# Altium PCB PCB1.PcbDoc (part 1 of 2)
Units mil, origin at the board's own origin, x right, y up, seen from the top; angles counter-clockwise.
Board outline 3937.01 x 3937.01 mil, 2 copper layers (Top Layer, Bottom Layer); 147 components, 119 nets, 531 pads, 24 vias.
Unrouted connection lines stored in the file: 277.
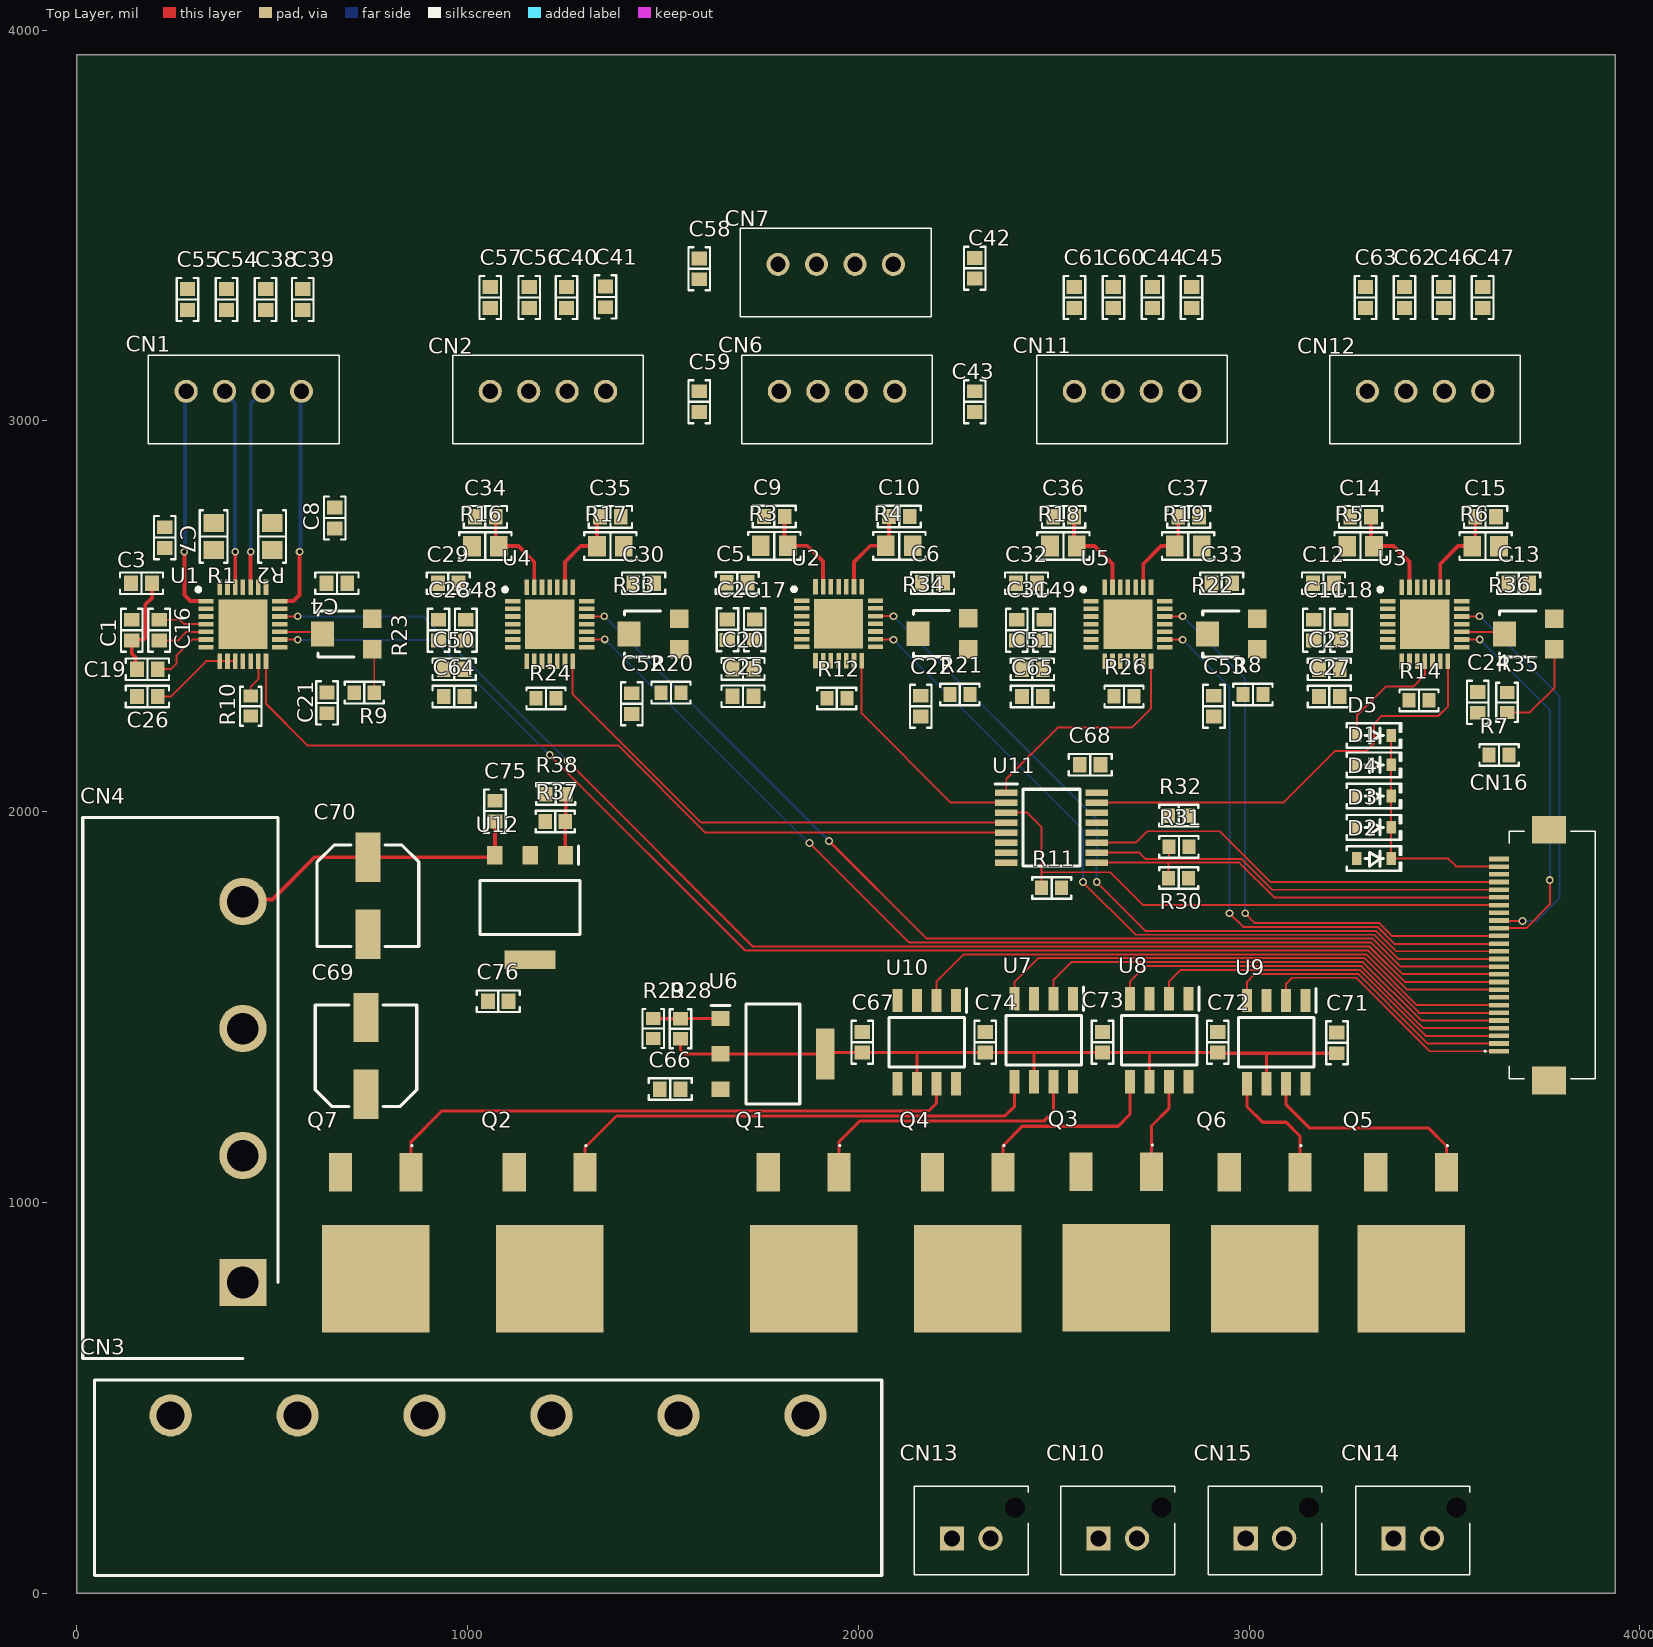
[diagram p0: Top Layer view]
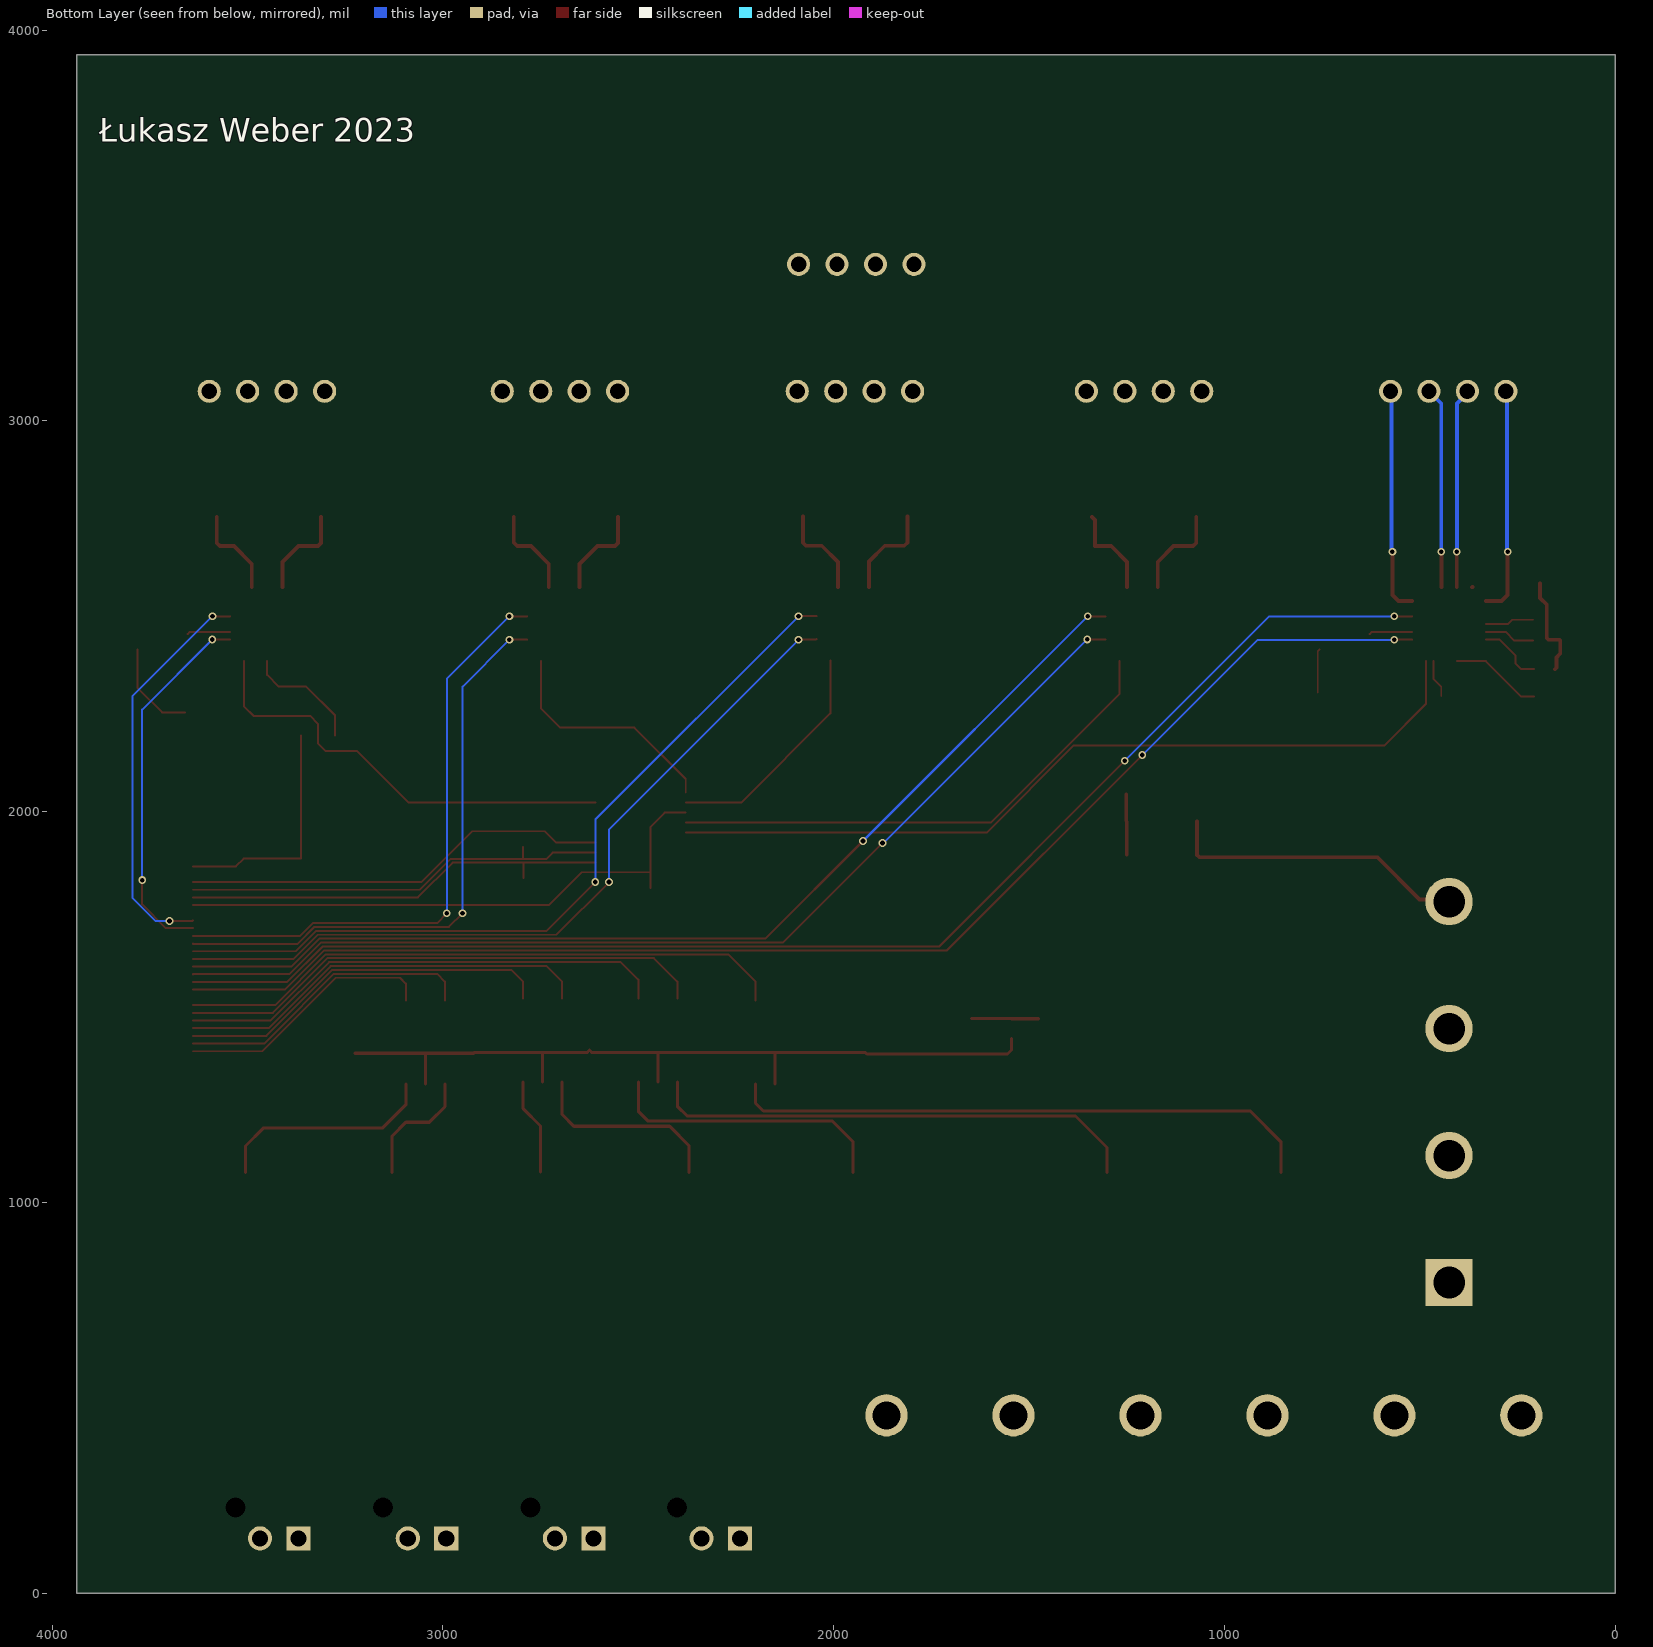
[diagram p1: Bottom Layer view, seen from below]

## Layer stack, top to bottom
Top Solder: solder mask 0.4, Solder Resist, Dk 3.5
Top Layer: signal copper 1.4
Dielectric 1: dielectric 12.6, FR-4, Dk 4.8
Bottom Layer: signal copper 1.4
Bottom Solder: solder mask 0.4, Solder Resist, Dk 3.5

## Board outline
0,0 0,3937.01 3937.01,3937.01 3937.01,0

## Design rules (kind name [scope] priority, off if disabled: settings)
BoardOutlineClearance [All] p1: gap=7.87 ignorepadtopadclearanceinfootprint=FALSE
Clearance [All] p1: gap=5 ignorepadtopadclearanceinfootprint=FALSE except(9.84: Arc-Hole Track-Hole SMDPad-Hole THPad-Hole Via-Hole Fill-Hole Poly-Hole Region-Hole Text-Hole)
ComponentClearance [All] p1: gap=5 collisioncheckmode=3 verticalgap=5 showdistances=TRUE
DiffPairsRouting [All] p1: maxlimit=10 minlimit=5 mostfreqgap=5 toplayer_minwidth=5 toplayer_maxwidth=1000 toplayer_prefwidth=5 bottomlayer_minwidth=5 bottomlayer_maxwidth=1000 bottomlayer_prefwidth=5 maxuncoupledlength=500
Height [All] p1: minheight=0 maxheight=71497.94 prefheight=500
HoleSize [All] p1: absolutevalues=TRUE maxlimit=248.03 minlimit=11.81 maxpercent=80.000 minpercent=20.000
HoleToHoleClearance [All] p1: gap=9.84 allowstackedmicrovias=FALSE
MinimumAnnularRing [All] p1: minimumring=3
MinimumSolderMaskSliver [All] p1: minsoldermaskwidth=0
PlaneClearance [All] p1: clearance=5
PlaneConnect PlaneConnectPowerPads [InPadClass('PowerPads')] p1: planeconnectstyle=Direct reliefexpansion=20 reliefentries=4 reliefconductorwidth=10 reliefairgap=10
PlaneConnect [All] p2: pad.planeconnectstyle=Relief pad.reliefexpansion=11.81 pad.reliefentries=4 pad.reliefconductorwidth=5 pad.reliefairgap=5 via.planeconnectstyle=Direct via.reliefexpansion=11.81 via.reliefentries=4 via.reliefconductorwidth=5 via.reliefairgap=5
PolygonConnect PolygonConnect_1 [InNet('VS')] p1: thpad.connectstyle=Relief thpad.reliefconductorwidth=10 thpad.reliefentries=4 thpad.polygonreliefangle="90 Angle" thpad.airgapwidth=10 smdpad.connectstyle=Direct smdpad.reliefconductorwidth=10 smdpad.reliefentries=4 smdpad.polygonreliefangle="90 Angle" smdpad.airgapwidth=10 via.connectstyle=Direct via.reliefconductorwidth=10 via.reliefentries=4 via.polygonreliefangle="90 Angle" via.airgapwidth=10
PolygonConnect PolygonConnectPowerPads [All vs (InPadClass('PowerPads'))] p2: connectstyle=Direct reliefconductorwidth=10 reliefentries=4 polygonreliefangle="90 Angle" airgapwidth=10
PolygonConnect [All] p3: thpad.connectstyle=Relief thpad.reliefconductorwidth=10 thpad.reliefentries=4 thpad.polygonreliefangle="90 Angle" thpad.airgapwidth=10 smdpad.connectstyle=Relief smdpad.reliefconductorwidth=10 smdpad.reliefentries=4 smdpad.polygonreliefangle="90 Angle" smdpad.airgapwidth=10 via.connectstyle=Direct via.reliefconductorwidth=5 via.reliefentries=4 via.polygonreliefangle="90 Angle" via.airgapwidth=5
RoomDefinition "Stepper Motor Drivers" [InComponentClass('Stepper Motor Drivers')] p1: confinementstyle=ConfineIn formatcopy=TRUE lockcomponents=FALSE outline -2370,-1261 -370,-1261 -370,-261 -2370,-261
RoomDefinition "Stepper Logic" [InComponentClass('Stepper Logic')] p2: confinementstyle=ConfineIn formatcopy=TRUE lockcomponents=FALSE outline -2370,-1261 -370,-1261 -370,-261 -2370,-261
RoomDefinition "PWM Driver" [InComponentClass('PWM Driver')] p3: confinementstyle=ConfineIn formatcopy=TRUE lockcomponents=FALSE outline -2370,-1261 -370,-1261 -370,-261 -2370,-261
RoomDefinition PowerDriver [InComponentClass('PowerDriver')] p4: confinementstyle=ConfineIn formatcopy=TRUE lockcomponents=FALSE outline -2370,-1261 -370,-1261 -370,-261 -2370,-261
RoutingVias [All] p1: holewidth=11.81 width=23.62 viastyle="Through Hole" minholewidth=11.81 minwidth=23.62 maxholewidth=23.62 maxwidth=259.84
SilkToSilkClearance [All] p1: silktosilkclearance=0
SilkToSolderMaskClearance [IsPad] p1: minsilkscreentomaskgap=4 clearancetoexposedcopper=TRUE
SolderMaskExpansion [All] p1: expansion=2.95 istentingtop=FALSE
Width [All] p1: maxlimit=1000 minlimit=5 preferedwidth=5 minimp=50.000000 maximp=50.000000 favimp=50.000000
20 further rules are at their usual default settings.

## Classes and differential pairs
net class U12_Nets: 3V3 5V NetR37_1
net class R38_Nets: GND NetR37_1
net class R37_Nets: 3V3 NetR37_1
net class R36_Nets: GND NetR35_2 NetR36_2
net class R35_Nets: 3V3 NetR35_2
net class R34_Nets: GND NetR21_2 NetR34_2
net class R33_Nets: GND NetR20_2 NetR33_2
net class R23_Nets: GND NetR9_2 NetR23_2
net class R22_Nets: GND NetR8_2 NetR22_2
net class R21_Nets: 3V3 NetR21_2
net class R20_Nets: 3V3 NetR20_2
net class R9_Nets: 3V3 NetR9_2
net class R8_Nets: 3V3 NetR8_2
net class CN4_Nets: 5V 24V GND
net class C76_Nets: 3V3 GND
net class C75_Nets: 5V GND
net class C74_Nets: 12V GND
net class C73_Nets: 12V GND
net class C72_Nets: 12V GND
net class C71_Nets: 12V GND
net class U11_Nets: 3V3 GND MLPX_A MLPX_B MLPX_C NetU11_2 NetU11_4 NetU11_5 NetU11_7 UART UART1 UART2 UART3 UART4 UART5
net class U10_Nets: 12V BEDG GND NetCN16_7 NetU10_1 NetU10_4 NetU10_5 NetU10_8
net class U9_Nets: 12V FANG GND NetCN16_1 NetCN16_2 NetU9_1 NetU9_8 NZLFG
net class U8_Nets: 12V FHE0G FHE1G GND NetCN16_3 NetCN16_4 NetU8_1 NetU8_8
net class U7_Nets: 12V GND HE0G HE1G NetCN16_5 NetCN16_6 NetU7_1 NetU7_8
net class U6_Nets: 12V 24V NetR28_1
net class U5_Nets: 3V3 24V DIR4 ENN GND NetC36_1 NetC37_1 NetC49_1 NetC49_2 NetC51_2 NetC65_2 NetD1_1 NetR22_2 NetR26_2 NetU5_7 NetU5_12 NetU5_20 NetU5_25 OA7 OA8 OB7 OB8 STEP4 UART4
net class U4_Nets: 3V3 24V DIR2 ENN GND NetC34_1 NetC35_1 NetC48_1 NetC48_2 NetC50_2 NetC64_2 NetD3_1 NetR24_2 NetR33_2 NetU4_7 NetU4_12 NetU4_20 NetU4_25 OA3 OA4 OB3 OB4 STEP2 UART2
net class U3_Nets: 3V3 24V DIR5 ENN GND NetC14_1 NetC15_1 NetC18_1 NetC18_2 NetC23_2 NetC27_2 NetD5_1 NetR14_2 NetR36_2 NetU3_7 NetU3_12 NetU3_20 NetU3_25 OA9 OA10 OB9 OB10 STEP5 UART5
net class U2_Nets: 3V3 24V DIR3 ENN GND NetC9_1 NetC10_1 NetC17_1 NetC17_2 NetC20_2 NetC25_2 NetD4_1 NetR12_2 NetR34_2 NetU2_7 NetU2_12 NetU2_20 NetU2_25 OA5 OA6 OB5 OB6 STEP3 UART3
net class U1_Nets: 3V3 24V DIR1 ENN GND NetC7_1 NetC8_1 NetC16_1 NetC16_2 NetC19_2 NetC26_2 NetD2_1 NetR10_2 NetR23_2 NetU1_7 NetU1_12 NetU1_20 NetU1_25 OA1 OA2 OB1 OB2 STEP1 UART1
net class R30_Nets: GND MLPX_A
net class R31_Nets: GND MLPX_B
net class R32_Nets: GND MLPX_C
net class R29_Nets: GND NetR28_1
net class R28_Nets: 12V NetR28_1
net class R26_Nets: GND NetR26_2
net class R24_Nets: GND NetR24_2
net class R19_Nets: GND NetC37_1
net class R18_Nets: GND NetC36_1
net class R17_Nets: GND NetC35_1
net class R16_Nets: GND NetC34_1
net class R14_Nets: GND NetR14_2
net class R12_Nets: GND NetR12_2
net class R11_Nets: 3V3 UART
net class R10_Nets: GND NetR10_2
net class R7_Nets: 3V3 ENN
net class R6_Nets: GND NetC15_1
net class R5_Nets: GND NetC14_1
net class R4_Nets: GND NetC10_1
net class R3_Nets: GND NetC9_1
net class R2_Nets: GND NetC8_1
net class R1_Nets: GND NetC7_1
net class Q7_Nets: BED BEDG GND
net class Q6_Nets: FANG GND NetCN15_2
net class Q5_Nets: GND NetCN14_2 NZLFG
net class Q4_Nets: FHE1G GND NetCN13_2
net class Q3_Nets: FHE0G GND NetCN10_2
net class Q2_Nets: GND HE1 HE1G
net class Q1_Nets: GND HE0 HE0G
net class D5_Nets: DIAG NetD5_1
net class D4_Nets: DIAG NetD4_1
net class D3_Nets: DIAG NetD3_1
net class D2_Nets: DIAG NetD2_1
net class D1_Nets: DIAG NetD1_1
net class CN16_Nets: DIAG DIR1 DIR2 DIR3 DIR4 DIR5 ENN GND MLPX_A MLPX_B MLPX_C NetCN16_1 NetCN16_2 NetCN16_3 NetCN16_4 NetCN16_5 NetCN16_6 NetCN16_7 STEP1 STEP2 STEP3 STEP4 STEP5 UART
net class CN15_Nets: 24V NetCN15_2
net class CN14_Nets: 24V NetCN14_2
net class CN13_Nets: 24V NetCN13_2
net class CN12_Nets: NetCN12_2 NetCN12_5 OA9 OA10 OB9 OB10
net class CN11_Nets: NetCN11_2 NetCN11_5 OA7 OA8 OB7 OB8
net class CN10_Nets: 24V NetCN10_2
net class CN7_Nets: NetCN7_2 NetCN7_5 OA5 OA6 OB5 OB6
net class CN6_Nets: NetCN6_2 NetCN6_5 OA5 OA6 OB5 OB6
net class C68_Nets: 3V3 GND
net class CN3_Nets: 24V BED HE0 HE1
net class CN2_Nets: NetCN2_2 NetCN2_5 OA3 OA4 OB3 OB4
net class CN1_Nets: NetCN1_2 NetCN1_5 OA1 OA2 OB1 OB2
net class C70_Nets: 5V GND
net class C69_Nets: 24V GND
net class C67_Nets: 12V GND
net class C66_Nets: 24V GND
net class C65_Nets: GND NetC65_2
net class C64_Nets: GND NetC64_2
net class C63_Nets: GND OB10
net class C62_Nets: GND OB9
net class C61_Nets: GND OB8
net class C60_Nets: GND OB7
net class C59_Nets: GND OB6
net class C58_Nets: GND OB5
net class C57_Nets: GND OB4
net class C56_Nets: GND OB3
net class C55_Nets: GND OB2
net class C54_Nets: GND OB1
net class C53_Nets: 3V3 GND
net class C52_Nets: 3V3 GND
net class C51_Nets: 24V NetC51_2
net class C50_Nets: 24V NetC50_2
net class C49_Nets: NetC49_1 NetC49_2
net class C48_Nets: NetC48_1 NetC48_2
net class C47_Nets: GND OA10
net class C46_Nets: GND OA9
net class C45_Nets: GND OA8
net class C44_Nets: GND OA7
net class C43_Nets: GND OA6
net class C42_Nets: GND OA5
net class C41_Nets: GND OA4
net class C40_Nets: GND OA3
net class C39_Nets: GND OA2
net class C38_Nets: GND OA1
net class C37_Nets: GND NetC37_1
net class C36_Nets: GND NetC36_1
net class C35_Nets: GND NetC35_1
net class C34_Nets: GND NetC34_1
net class C33_Nets: 24V GND
net class C32_Nets: 24V GND
net class C31_Nets: 24V GND
net class C30_Nets: 24V GND
net class C29_Nets: 24V GND
net class C28_Nets: 24V GND
net class C27_Nets: GND NetC27_2
net class C26_Nets: GND NetC26_2
net class C25_Nets: GND NetC25_2
net class C24_Nets: 3V3 GND
net class C23_Nets: 24V NetC23_2
net class C22_Nets: 3V3 GND
net class C21_Nets: 3V3 GND
net class C20_Nets: 24V NetC20_2
net class C19_Nets: 24V NetC19_2
net class C18_Nets: NetC18_1 NetC18_2
net class C17_Nets: NetC17_1 NetC17_2
net class C16_Nets: NetC16_1 NetC16_2
net class C15_Nets: GND NetC15_1
net class C14_Nets: GND NetC14_1
net class C13_Nets: 24V GND
net class C12_Nets: 24V GND
net class C11_Nets: 24V GND
net class C10_Nets: GND NetC10_1
net class C9_Nets: GND NetC9_1
net class C8_Nets: GND NetC8_1
net class C7_Nets: GND NetC7_1
net class C6_Nets: 24V GND
net class C5_Nets: 24V GND
net class C4_Nets: 24V GND
net class C3_Nets: 24V GND
net class C2_Nets: 24V GND
net class C1_Nets: 24V GND
net class UART[1..5]: UART1 UART2 UART3 UART4 UART5
net class STEP[1..5]: STEP1 STEP2 STEP3 STEP4 STEP5
net class DIR[1..5]: DIR1 DIR2 DIR3 DIR4 DIR5
component class "Stepper Motor Drivers": 27.559 C1 C2 C3 C4 C5 C6 C7 C8 C9 C10 C11 C12 C13 C14 C15 C16 C17 C18 C19 C20 C21 C22 C23 C24 C25 C26 C27 C28 C29 C30 C31 C32 C33 C34 C35 C36 C37 C38 C39 C40 C41 C42 C43 C44 C45 C46 C47 C48 C49 C50 C51 C52 C53 C54 C55 C56 C57 C58 C59 C60 C61 C62 C63 C64 C65 CN1 CN2 CN6 CN7 CN11 CN12 D1 D2 D3 D4 D5 R2 R3 R4 R5 R6 R7 R8 R9 R10 R12 R14 R16 R17 R18 R19 R20 R21 R22 R23 R24 R26 R33 R34 R35 R36 U1 U2 U3 U4 U5
component class "Stepper Logic": C68 R11 R30 R31 R32 U11
component class "PWM Driver": C66 C67 C71 C72 C73 C74 CN3 CN10 CN13 CN14 CN15 Q1 Q2 Q3 Q4 Q5 Q6 Q7 R28 R29 U6 U7 U8 U9 U10
component class PowerDriver: C69 C70 C75 C76 CN4 CN16 R37 R38 U12

## Components (designator, comment, footprint, x,y, rotation, side; value= is the part's Value field where it differs from the comment)
C1 "1µF" "CAP 0603_1608" 140.51,2464.68 r270 top
C2 "1µF" "CAP 0603_1608" 1665,2465.59 r270 top
C3 "0.1 µF" "CAP 0603_1608" 165.51,2584.68 r0 top
C4 "0.1 µF" "CAP 0603_1608" 665.51,2584.68 r180 top
C5 "0.1 µF" "CAP 0603_1608" 1690,2585.59 r0 top
C6 "0.1 µF" "CAP 0603_1608" 2190,2585.59 r0 top
C7 "0.1 µF" "CAP 0603_1608" 225,2701.57 r90 top
C8 "0.1 µF" "CAP 0603_1608" 660,2751.57 r90 top
C9 "0.1 µF" "CAP 0603_1608" 1785,2755.59 r180 top
C10 "0.1 µF" "CAP 0603_1608" 2105,2755.59 r0 top
C11 "1µF" "CAP 0603_1608" 3165.51,2464.68 r270 top
C12 "0.1 µF" "CAP 0603_1608" 3190.51,2584.68 r0 top
C13 "0.1 µF" "CAP 0603_1608" 3690.51,2584.68 r180 top
C14 "0.1 µF" "CAP 0603_1608" 3285.51,2754.68 r180 top
C15 "0.1 µF" "CAP 0603_1608" 3605.51,2754.68 r0 top
C16 "22n" "CAP 0603_1608" 210.51,2464.68 r270 top
C17 "22n" "CAP 0603_1608" 1735,2465.59 r270 top
C18 "22n" "CAP 0603_1608" 3235.51,2464.68 r270 top
C19 "0.1 µF" "CAP 0603_1608" 180.51,2364.68 r0 top
C20 "0.1 µF" "CAP 0603_1608" 1705,2365.59 r0 top
C21 "0.1 µF" "CAP 0603_1608" 640,2278.43 r90 top
C22 "0.1 µF" "CAP 0603_1608" 2160,2270 r90 top
C23 "0.1 µF" "CAP 0603_1608" 3205.51,2364.68 r0 top
C24 "0.1 µF" "CAP 0603_1608" 3585.51,2279.68 r90 top
C25 "4.7µF" "CAP 0603_1608" 1705,2295.59 r0 top
C26 "4.7µF" "CAP 0603_1608" 180.51,2294.68 r0 top
C27 "4.7µF" "CAP 0603_1608" 3205.51,2294.68 r0 top
C28 "1µF" "CAP 0603_1608" 925.51,2464.68 r270 top
C29 "0.1 µF" "CAP 0603_1608" 950.51,2584.68 r0 top
C30 "0.1 µF" "CAP 0603_1608" 1450.51,2584.68 r0 top
C31 "1µF" "CAP 0603_1608" 2405.51,2464.68 r270 top
C32 "0.1 µF" "CAP 0603_1608" 2430.51,2584.68 r0 top
C33 "0.1 µF" "CAP 0603_1608" 2930.51,2584.68 r0 top
C34 "0.1 µF" "CAP 0603_1608" 1045.51,2754.68 r180 top
C35 "0.1 µF" "CAP 0603_1608" 1365.51,2754.68 r0 top
C36 "0.1 µF" "CAP 0603_1608" 2525.51,2754.68 r180 top
C37 "0.1 µF" "CAP 0603_1608" 2845.51,2754.68 r0 top
C38 "470 pF" "CAP 0603_1608" 483,3311 r270 top
C39 "470 pF" "CAP 0603_1608" 578,3311 r270 top
C40 "470 pF" "CAP 0603_1608" 1253,3316 r270 top
C41 "470 pF" "CAP 0603_1608" 1353,3317.57 r270 top
C42 "470 pF" "CAP 0603_1608" 2298,3391 r90 top
C43 "470 pF" "CAP 0603_1608" 2298,3049.43 r90 top
C44 "470 pF" "CAP 0603_1608" 2753,3316 r270 top
C45 "470 pF" "CAP 0603_1608" 2853,3316 r270 top
C46 "470 pF" "CAP 0603_1608" 3498,3316 r270 top
C47 "470 pF" "CAP 0603_1608" 3598,3316 r270 top
C48 "22n" "CAP 0603_1608" 995.51,2464.68 r270 top
C49 "22n" "CAP 0603_1608" 2475.51,2464.68 r270 top
C50 "0.1 µF" "CAP 0603_1608" 965.51,2364.68 r0 top
C51 "0.1 µF" "CAP 0603_1608" 2445.51,2364.68 r0 top
C52 "0.1 µF" "CAP 0603_1608" 1420,2276.57 r90 top
C53 "0.1 µF" "CAP 0603_1608" 2910,2270 r90 top
C54 "470 pF" "CAP 0603_1608" 383,3311 r270 top
C55 "470 pF" "CAP 0603_1608" 283,3311 r270 top
C56 "470 pF" "CAP 0603_1608" 1158,3316 r270 top
C57 "470 pF" "CAP 0603_1608" 1058,3316 r270 top
C58 "470 pF" "CAP 0603_1608" 1593,3389.43 r90 top
C59 "470 pF" "CAP 0603_1608" 1593,3049.43 r90 top
C60 "470 pF" "CAP 0603_1608" 2653,3316 r270 top
C61 "470 pF" "CAP 0603_1608" 2553,3316 r270 top
C62 "470 pF" "CAP 0603_1608" 3398,3316 r270 top
C63 "470 pF" "CAP 0603_1608" 3298,3316 r270 top
C64 "4.7µF" "CAP 0603_1608" 965.51,2294.68 r0 top
C65 "4.7µF" "CAP 0603_1608" 2445.51,2294.68 r0 top
C66 "0.1 µF" "CAP 0603_1608" 1518.43,1290 r0 top
C67 "1µF" "CAP 0603_1608" 2010,1410 r270 top
C68 "0.1 µF" "CAP 0603_1608" 2593.43,2120 r0 top
C69 "100 µF" "CAP ALSMD 6.6MM H7.7MM" 740,1375 r90 top
C70 "100 µF" "CAP ALSMD 6.6MM H7.7MM" 745,1785 r270 top
C71 "0.1 µF" "CAP 0603_1608" 3225,1408.43 r270 top
C72 "0.1 µF" "CAP 0603_1608" 2920,1410 r270 top
C73 "0.1 µF" "CAP 0603_1608" 2625,1410 r270 top
C74 "0.1 µF" "CAP 0603_1608" 2325,1410 r270 top
C75 "0.1 µF" "CAP 0603_1608" 1070,2001.57 r270 top
C76 "1µF" "CAP 0603_1608" 1078.43,1515 r0 top
CN1 "B4B-XH-A_LF__SN_" B4BXHALFSN 574.85,3076 r180 top
CN2 "B4B-XH-A_LF__SN_" B4BXHALFSN 1353.28,3076 r180 top
CN3 "4DB-P108-06" 4DBP10806 1865,455 r180 top
CN4 "4DB-P108-04" SHDR4W132P0X826_1X4_3467X1270X1346P 425,795 r90 top
CN6 "B4B-XH-A_LF__SN_" B4BXHALFSN 2093.28,3076 r180 top
CN7 "B4B-XH-A_LF__SN_" B4BXHALFSN 2089.85,3401 r180 top
CN10 "B2B-XH-AM_LF__SN_" B2BXHAMLFSN 2615,140 r0 top
CN11 "B4B-XH-A_LF__SN_" B4BXHALFSN 2848.28,3076 r180 top
CN12 "B4B-XH-A_LF__SN_" B4BXHALFSN 3598.28,3076 r180 top
CN13 "B2B-XH-AM_LF__SN_" B2BXHAMLFSN 2240,140 r0 top
CN14 "B2B-XH-AM_LF__SN_" B2BXHAMLFSN 3370,140 r0 top
CN15 "B2B-XH-AM_LF__SN_" B2BXHAMLFSN 2991.57,140 r0 top
CN16 "FH12-26S-0.5SH_55_" FH1226S05SH55 3744.33,1632.95 r90 top
D1 "BAT42WS-7-F" SOD323 3320,2120 r0 top
D2 "BAT42WS-7-F" SOD323 3320,1880 r0 top
D3 "BAT42WS-7-F" SOD323 3320,1960 r0 top
D4 "BAT42WS-7-F" SOD323 3320,2040 r0 top
D5 "BAT42WS-7-F" SOD323 3320,2195 r0 top
Q1 "IRLR7843TR" IRLR7843TR 1860,893.19 r180 top
Q2 "IRLR7843TR" IRLR7843TR 1210,893.19 r180 top
Q3 "IRLR7843TR" IRLR7843TR 2660,895 r180 top
Q4 "IRLR7843TR" IRLR7843TR 2280,893.19 r180 top
Q5 "IRLR7843TR" IRLR7843TR 3415,893.19 r180 top
Q6 "IRLR7843TR" IRLR7843TR 3040,893.19 r180 top
Q7 "IRLR7843TR" IRLR7843TR 765,893.19 r180 top
R1 "0R11" "RES 0805_2012" 350,2704.45 r90 top
R2 "0R11" "RES 0805_2012" 500,2704.45 r90 top
R3 "0R11" "RES 0805_2012" 1785,2680.59 r180 top
R4 "0R11" "RES 0805_2012" 2105,2680.59 r0 top
R5 "0R11" "RES 0805_2012" 3285.51,2679.68 r180 top
R6 "0R11" "RES 0805_2012" 3605.51,2679.68 r0 top
R7 "10k" "RES 0603_1608" 3640,2145 r180 top
R8 "4k7" "RES 0603_1608" 3010,2300 r0 top
R9 "4k7" "RES 0603_1608" 735.51,2304.68 r0 top
R10 "20k" "RES 0603_1608" 445,2270 r90 top
R11 "22k" "RES 0603_1608" 2495,1805 r0 top
R12 "20k" "RES 0603_1608" 1945,2290 r0 top
R14 "20k" "RES 0603_1608" 3435,2285 r0 top
R16 "0R11" "RES 0805_2012" 1045.51,2679.68 r180 top
R17 "0R11" "RES 0805_2012" 1365.51,2679.68 r0 top
R18 "0R11" "RES 0805_2012" 2525,2680 r180 top
R19 "0R11" "RES 0805_2012" 2844.45,2680 r0 top
R20 "4k7" "RES 0603_1608" 1520.51,2304.68 r0 top
R21 "4k7" "RES 0603_1608" 2260,2300 r0 top
R22 "20k" "POT BOURNS TRIMPOT TC33" 2950.51,2454.68 r90 top value="20 kOhms"
R23 "20k" "POT BOURNS TRIMPOT TC33" 685.51,2454.68 r90 top value="20 kOhms"
R24 "20k" "RES 0603_1608" 1200.59,2290 r0 top
R26 "20k" "RES 0603_1608" 2680,2295 r0 top
R28 "240R" "RES 0603_1608" 1545,1444.41 r270 top
R29 "2k" "RES 0603_1608" 1475,1445 r90 top
R30 "10k" "RES 0603_1608" 2820,1830 r0 top
R31 "10k" "RES 0603_1608" 2820.59,1910 r0 top
R32 "10k" "RES 0603_1608" 2820,1990 r0 top
R33 "20k" "POT BOURNS TRIMPOT TC33" 1470.51,2454.68 r90 top value="20 kOhms"
R34 "20k" "POT BOURNS TRIMPOT TC33" 2210,2455.59 r90 top value="20 kOhms"
R35 "4k7" "RES 0603_1608" 3660.51,2279.68 r270 top
R36 "20k" "POT BOURNS TRIMPOT TC33" 3710.51,2454.68 r90 top value="20 kOhms"
R37 "220R" "RES 0603_1608" 1224.41,1975 r180 top
R38 "360R" "RES 0603_1608" 1225.59,2045 r0 top
U1 "TMC2208-LA-T" QFN50P500X500X90-29N-D 425,2480 r0 top
U2 "TMC2208-LA-T" QFN50P500X500X90-29N-D 1949.49,2480.91 r0 top
U3 "TMC2208-LA-T" QFN50P500X500X90-29N-D 3450,2480 r0 top
U4 "TMC2208-LA-T" QFN50P500X500X90-29N-D 1210,2480 r0 top
U5 "TMC2208-LA-T" QFN50P500X500X90-29N-D 2690,2480 r0 top
U6 "LM317MBSTT3G" SOT230P700X175-4N 1781.14,1380 r0 top
U7 "TC4427EOA713" SOIC127P600X175-8N 2475,1415 r270 top
U8 "TC4427EOA713" SOIC127P600X175-8N 2770,1415 r270 top
U9 "TC4427EOA713" SOIC127P600X175-8N 3070,1410 r270 top
U10 "TC4427EOA713" SOIC127P600X175-8N 2175,1410 r270 top
U11 "NX3L4051PW,118" SOP65P640X110-16N 2494.33,1958.98 r0 top
U12 "LM317MBSTT3G" SOT230P700X175-4N 1160,1755 r270 top

## Footprints (in the part's own frame and the unit in brackets; to place one, negate y for a bottom-side part, rotate by r counter-clockwise, add the part's x,y. Pads: shape width x height; smd on the part's side, far side on the other; paste and mask are expansions set on the pad)
4DBP10806 [mil]
  round 107.99 hole 72: 1(0,0) 2(325,0) 3(650,0) 4(975,0) 5(1300,0) 6(1625,0)
  silkscreen extent -195,-90 1820,410, body extent -195,-90 1820,410, height 544
B2BXHAMLFSN [mm]
  rect 1.575x1.575 hole 1.05: 1(0,0)
  round 1.575 hole 1.05: 2(2.5,0)
  round 0.65 hole 1.3 unplated: MH1(4.1,2)
  silkscreen extent -2.45,-2.35 4.95,3.4, body extent -2.45,-2.36 4.95,3.39, height 6.9
B4BXHALFSN [mm]
  round 1.5 hole 1: 1(0,0) 2(2.5,0) 3(5,0) 4(7.5,0)
  silkscreen extent -2.45,-2.35 9.95,3.4, body extent -2.45,-2.35 9.95,3.4, height 7.52
"CAP 0603_1608" [mm] "Chip Capacitor, 2-Leads, Body 1.60x0.80mm, IPC Medium Density"
  rect 0.9x1 smd: 1(-0.675,0) 2(0.675,0)
  silkscreen extent -1.4,-0.7 1.4,0.7, body extent -0.8,-0.41 0.8,0.41, height 0.82
"CAP ALSMD 6.6MM H7.7MM" [mm] "Aluminum Electrolytic Capacitor, Body 6.60x6.60x7.70mm, IPC Low Density"
  rect 3.2x1.6 smd: 1(-2.5,0) 2(2.5,0)
  silkscreen extent -3.3,-3.3 3.3,3.3, body extent -3.6,-3.3 3.6,3.3, height 7.7
FH1226S05SH55 [mm]
  rect 0.3x1.3 smd: 1(-6.25,2.65) 2(-5.75,2.65) 3(-5.25,2.65) 4(-4.75,2.65) 5(-4.25,2.65) 6(-3.75,2.65) 7(-3.25,2.65) 8(-2.75,2.65) 9(-2.25,2.65) 10(-1.75,2.65) 11(-1.25,2.65) 12(-0.75,2.65) 13(-0.25,2.65) 14(0.25,2.65) 15(0.75,2.65) 16(1.25,2.65) 17(1.75,2.65) 18(2.25,2.65) 19(2.75,2.65) 20(3.25,2.65) 21(3.75,2.65) 22(4.25,2.65) 23(4.75,2.65) 24(5.25,2.65) 25(5.75,2.65) 26(6.25,2.65)
  rect 1.8x2.2 smd: MP1(-8.15,-0.6) MP2(8.15,-0.6)
  silkscreen extent -8.05,-3.6 8.05,3.6, body extent -8.87,-3.6 8.87,3.27, height 2.3
IRLR7843TR [mm]
  rect 1.5x2.5 smd: 1(-2.3,-4.66) 3(2.3,-4.66)
  rect 7x7 smd: 2(0,2.24)
  silkscreen extent -2.4,-6.45 -2.3,-6.35, body extent -3.43,-4.3 3.27,5.69, height 2.35
"POT BOURNS TRIMPOT TC33" [mm] "Bourns Trimpot TC33X-1 - Open Frame 3mm x 3.8mm x 1.2mm"
  rect 1.2x1.2 smd: 1(-1,-1.8) 3(1,-1.8)
  rect 1.6x1.5 smd: 2(0,1.45)
  silkscreen extent -1.5,-0.6 1.5,1.75, body extent -1.8,-1.91 1.8,1.95, height 1.15
QFN50P500X500X90-29N-D [mm]
  rect 1x0.3 smd: 1(-2.4,1.5) 2(-2.4,1) 3(-2.4,0.5) 4(-2.4,0) 5(-2.4,-0.5) 6(-2.4,-1) 7(-2.4,-1.5) 15(2.4,-1.5) 16(2.4,-1) 17(2.4,-0.5) 18(2.4,0) 19(2.4,0.5) 20(2.4,1) 21(2.4,1.5)
  rect 0.3x1 smd: 8(-1.5,-2.4) 9(-1,-2.4) 10(-0.5,-2.4) 11(0,-2.4) 12(0.5,-2.4) 13(1,-2.4) 14(1.5,-2.4) 22(1.5,2.4) 23(1,2.4) 24(0.5,2.4) 25(0,2.4) 26(-0.5,2.4) 27(-1,2.4) 28(-1.5,2.4)
  rect 3.2x3.2 smd: 29(0,0)
  silkscreen extent -3.02,2.13 -2.77,2.37, body extent -2.55,-2.55 2.55,2.55, height 0.9
"RES 0603_1608" [mm] "Chip Resistor, 2-Leads, Body 1.60x0.80mm, IPC Medium Density"
  rect 0.85x0.95 smd: 1(-0.65,0) 2(0.65,0)
  silkscreen extent -1.27,-0.7 1.27,0.7, body extent -0.8,-0.4 0.8,0.4, height 0.45
"RES 0805_2012" [mm] "Chip Resistor, 2-Leads, Body 2.00x1.25mm, IPC Medium Density"
  rect 1.15x1.35 smd: 1(-0.875,0) 2(0.875,0)
  silkscreen extent -1.7,-0.9 1.7,0.9, body extent -1,-0.62 1,0.63, height 0.6
SHDR4W132P0X826_1X4_3467X1270X1346P [mm]
  rect 3.075x3.075 hole 2.05: 1(0,0)
  round 3.075 hole 2.05: 2(8.255,0) 3(16.51,0) 4(24.765,0)
  silkscreen extent -4.95,-2.29 30.23,10.41, body extent -4.95,-2.29 29.72,10.41, height 13.46
SOD323 [mm] "SOD, 2-Leads, Body 1.25x2.50mm, IPC Medium Density"
  rect 0.625x0.83 smd: 1(-1.112,0) 2(1.112,0)
  silkscreen extent -1.78,-0.8 1.78,0.8, body extent -1.36,-0.62 1.36,0.62, height 1.05
SOIC127P600X175-8N [mm]
  rect 1.525x0.65 smd: 1(-2.712,1.905) 2(-2.712,0.635) 3(-2.712,-0.635) 4(-2.712,-1.905) 5(2.712,-1.905) 6(2.712,-0.635) 7(2.712,0.635) 8(2.712,1.905)
  silkscreen extent -3.47,-2.45 1.6,2.58, body extent -3,-2.45 3,2.45, height 1.75
SOP65P640X110-16N [mm]
  rect 1.475x0.45 smd: 1(-2.938,2.275) 2(-2.938,1.625) 3(-2.938,0.975) 4(-2.938,0.325) 5(-2.938,-0.325) 6(-2.938,-0.975) 7(-2.938,-1.625) 8(-2.938,-2.275) 9(2.938,-2.275) 10(2.938,-1.625) 11(2.938,-0.975) 12(2.938,-0.325) 13(2.938,0.325) 14(2.938,0.975) 15(2.938,1.625) 16(2.938,2.275)
  silkscreen extent -3.67,-2.5 1.85,2.85, body extent -3.2,-2.5 3.2,2.5, height 1.1
SOT230P700X175-4N [mm]
  rect 1.2x1 smd: 1(-3.4,2.3) 2(-3.4,0) 3(-3.4,-2.3)
  rect 1.2x3.3 smd: 4(3.4,0)
  silkscreen extent -4,-3.25 1.75,3.25, body extent -3.5,-3.25 3.5,3.25, height 1.75

## Part data
C1 C2 C11 C28 C31: library part 06035C105KAT2A, "CAP CER 1UF 50V X7R 0603", Device Package="0603 (1608 Metric)", manufacturer="AVX Corporation", Operating Temperature="-55°C ~ 125°C", Supplier Part Number 1=478-10073-1-ND, Temperature Coefficient=X7R, Tolerance=±10%, Voltage - Rated=50V, Applications="General Purpose", Capacitance=1µF, componentlink1description=Datasheet, componentlink1url=http://datasheets.avx.com/X7RDielectric.pdf, componentlink2description="DigiKey Link", componentlink2url=http://digikey.com/product-detail/en/avx-corporation/06035C105KAT2A/478-10073-1-ND/6564295, lastupdated="9/2/2020 1:03:35 AM", Lifecycle Status=Active, Minimum Order=1, Mounting Type="Surface Mount, MLCC", Package / Case="0603 (1608 Metric)", packaging=TapeAndReel, Part Number=06035C105KAT2A, Part Status=Active, partid=2905, price=0.15, series=-, Size / Dimension="0.063\" L x 0.032\" W (1.60mm x 0.81mm)", Supplier 1=DigiKey, Thickness (Max)="0.020\" (0.50mm)"
C3 C4 C5 C6 C7 C8 C9 C10 C12 C13 C14 C15 C19 C20 C21 C22 C23 C24 C29 C30 C32 C33 C34 C35 C36 C37 C50 C51 C52 C53 C66 C68 C71 C72 C73 C74 C75: library part 0603B104K101CT, "CAP CER 0.1UF 100V X7R 0603", Device Package="0603 (1608 Metric)", manufacturer="Walsin Technology Corporation", Operating Temperature="-55°C ~ 125°C", Supplier Part Number 1=1292-1392-1-ND, Temperature Coefficient=X7R, Tolerance=±10%, Voltage - Rated=100V, Applications="General Purpose", Capacitance="0.1 µF", componentlink1description=Datasheet, componentlink1url=http://www.passivecomponent.com/wp-content/uploads/2018/10/MLCC.pdf, componentlink2description="DigiKey Link", componentlink2url=https://www.digikey.com/en/products/detail/walsin-technology-corporation/0603B104K101CT/9354889, lastupdated="4/8/2023 7:09:18 PM", Lifecycle Status=Active, Minimum Order=1, Mounting Type="Surface Mount, MLCC", Package / Case="0603 (1608 Metric)", packaging=TapeAndReel, Part Number=0603B104K101CT, Part Status=Active, partid=4273, price=0.01, series=-, Size / Dimension="0.063\" L x 0.031\" W (1.60mm x 0.80mm)", Supplier 1=DigiKey, Thickness (Max)="0.037\" (0.95mm)"
C16 C17 C18 C48 C49: library part C0603C222G5GAC7867, "CAP CER 2200PF 50V NP0 0603", Capacitance="2200 pF", Device Package="0603 (1608 Metric)", manufacturer=KEMET, Operating Temperature="-55°C ~ 125°C", Supplier Part Number 1=399-14503-1-ND, Temperature Coefficient="C0G, NP0", Tolerance=±2%, Voltage - Rated=50V, Applications="General Purpose", componentlink1description=Datasheet, componentlink1url=https://api.kemet.com/component-edge/download/datasheet/C0603C222G5GACTU.pdf, componentlink2description="DigiKey Link", componentlink2url=https://www.digikey.com/en/products/detail/kemet/C0603C222G5GAC7867/2200244, Features="Low ESL", lastupdated="4/8/2023 7:08:51 PM", Lifecycle Status=Active, Minimum Order=1, Mounting Type="Surface Mount, MLCC", Package / Case="0603 (1608 Metric)", packaging=TapeAndReel, Part Number=C0603C222G5GAC7867, Part Status=Active, partid=12773, price=0.18, series="SMD Comm C0G", Size / Dimension="0.063\" L x 0.031\" W (1.60mm x 0.80mm)", Supplier 1=DigiKey, Thickness (Max)="0.034\" (0.87mm)"
C25 C26 C27 C64 C65: library part 06036D475MAT2A, "CAP CER 4.7UF 6.3V X5R 0603", Device Package="0603 (1608 Metric)", manufacturer="AVX Corporation", Operating Temperature="-55°C ~ 85°C", Supplier Part Number 1=478-2582-1-ND, Temperature Coefficient=X5R, Tolerance=±20%, Voltage - Rated=6.3V, Applications="General Purpose", Capacitance=4.7µF, componentlink1description=Datasheet, componentlink1url=http://datasheets.avx.com/cx5r.pdf, componentlink2description="DigiKey Link", componentlink2url=http://digikey.com/product-detail/en/avx-corporation/06036D475MAT2A/478-2582-1-ND/717527, lastupdated="9/2/2020 1:03:34 AM", Lifecycle Status=Active, Minimum Order=1, Mounting Type="Surface Mount, MLCC", Package / Case="0603 (1608 Metric)", packaging=CutTape, Part Number=06036D475MAT2A, Part Status=Active, partid=2938, price=0.81, series=-, Size / Dimension="0.063\" L x 0.032\" W (1.60mm x 0.81mm)", Supplier 1=DigiKey, Thickness (Max)="0.035\" (0.90mm)"
C38 C39 C40 C41 C42 C43 C44 C45 C46 C47 C54 C55 C56 C57 C58 C59 C60 C61 C62 C63: library part C0603X471J5RAC7867, "CAP CER 0603 470PF 5% X7R 50V FL", Device Package="0603 (1608 Metric)", manufacturer=KEMET, Operating Temperature="-55°C ~ 125°C", Supplier Part Number 1=399-17611-1-ND, Temperature Coefficient=X7R, Tolerance=±5%, Voltage - Rated=50V, Applications="Boardflex Sensitive", Capacitance="470 pF", componentlink1description=Datasheet, componentlink1url=https://api.kemet.com/component-edge/download/datasheet/C0603X471J5RAC7867.pdf, componentlink2description="DigiKey Link", componentlink2url=https://www.digikey.com/en/products/detail/kemet/C0603X471J5RAC7867/8572446, Features="Soft Termination", lastupdated="4/8/2023 7:09:16 PM", Lifecycle Status=Active, Minimum Order=1, Mounting Type="Surface Mount, MLCC", Package / Case="0603 (1608 Metric)", packaging=TapeAndReel, Part Number=C0603X471J5RAC7867, Part Status=Active, partid=4946, price=0.09, series="SMD Comm X7R Flex", Size / Dimension="0.063\" L x 0.031\" W (1.60mm x 0.80mm)", Supplier 1=DigiKey, Thickness (Max)="0.037\" (0.95mm)"
C67 C76: library part 0603YD105KAT4A, "CAP CER 1UF 16V X5R 0603", Device Package="0603 (1608 Metric)", manufacturer="AVX Corporation", Operating Temperature="-55°C ~ 85°C", Supplier Part Number 1=478-10365-1-ND, Temperature Coefficient=X5R, Tolerance=±10%, Voltage - Rated=16V, Applications="General Purpose", Capacitance=1µF, componentlink1description=Datasheet, componentlink1url=http://datasheets.avx.com/cx5r.pdf, componentlink2description="DigiKey Link", componentlink2url=http://digikey.com/product-detail/en/avx-corporation/0603YD105KAT4A/478-10365-1-ND/6797443, lastupdated="9/2/2020 1:03:10 AM", Lifecycle Status=Active, Minimum Order=1, Mounting Type="Surface Mount, MLCC", Package / Case="0603 (1608 Metric)", packaging=TapeAndReel, Part Number=0603YD105KAT4A, Part Status=Active, partid=15257, price=0.03, series=-, Size / Dimension="0.063\" L x 0.032\" W (1.60mm x 0.81mm)", Supplier 1=DigiKey, Thickness (Max)="0.035\" (0.90mm)"
C69 C70: library part UWT1E101MCL1GS, "CAP ALUM 100UF 20% 25V SMD", Device Package="Radial, Can - SMD", Lifetime @ Temp.="1000 Hrs @ 105°C", manufacturer=Nichicon, Operating Temperature="-55°C ~ 105°C", Ripple Current @ High Frequency="136.5 mA @ 10 kHz", Ripple Current @ Low Frequency="91 mA @ 120 Hz", Supplier Part Number 1=493-2190-1-ND, Tolerance=±20%, Voltage - Rated="25 V", Applications="General Purpose", Capacitance="100 µF", componentlink1description=Datasheet, componentlink1url=https://products.nichicon.co.jp/en/pdf/XJA043/e-uwt.pdf, componentlink2description="DigiKey Link", componentlink2url=https://www.digikey.com/en/products/detail/nichicon/UWT1E101MCL1GS/589931, Height - Seated (Max)="0.303\" (7.70mm)", lastupdated="6/18/2023 8:45:36 PM", Lifecycle Status=Active, Minimum Order=1, Mounting Type="Surface Mount", Package / Case="Radial, Can - SMD", packaging=TapeAndReel, Part Number=UWT1E101MCL1GS, Part Status=Active, partid=27222, Polarization=Polar, price=0.10, series=UWT, Size / Dimension="0.248\" Dia (6.30mm)", Supplier 1=DigiKey, Surface Mount Land Size="0.260\" L x 0.260\" W (6.60mm x 6.60mm)"
CN1 CN2 CN6 CN7 CN11 CN12: "Connector", Arrow Part Number=B4B-XH-A(LF)(SN), Manufacturer_Name="JST (JAPAN SOLDERLESS TERMINALS)", Arrow Price/Stock=https://www.arrow.com/en/products/b4b-xh-a-lf-sn/jst-manufacturing?region=europe, Datasheet Link=https://datasheet.lcsc.com/szlcsc/JST-Sales-America-B4B-XH-A-LF-SN_C144395.pdf, Height=7mm, Manufacturer_Part_Number=B4B-XH-A(LF)(SN)
CN3: "Connector", Manufacturer_Name="TE Connectivity", Mouser Part Number=571-214376679, Datasheet Link=https://www.te.com/commerce/DocumentDelivery/DDEController?Action=srchrtrv&DocNm=2-1437667-4&DocType=Customer+Drawing&DocLang=English, Height=13.716mm, Manufacturer_Part_Number=4DB-P108-06, Mouser Price/Stock=https://www.mouser.com/Search/Refine.aspx?Keyword=571-214376679
CN4: "Connector", Manufacturer_Name="TE Connectivity", Mouser Part Number=571-214376676, Arrow Part Number=4DB-P108-04, Arrow Price/Stock=https://www.arrow.com/en/products/4db-p108-04/te-connectivity?region=nac, Datasheet Link=https://www.te.com/commerce/DocumentDelivery/DDEController?Action=srchrtrv&DocNm=2-1437667-4&DocType=Customer+Drawing&DocLang=English, Height=13.462mm, Manufacturer_Part_Number=4DB-P108-04, Mouser Price/Stock=https://www.mouser.co.uk/ProductDetail/TE-Connectivity/4DB-P108-04?qs=JZD3Rbs9XzlqoR88q1UQbw%3D%3D
CN10 CN13 CN14 CN15: "Connector", Arrow Part Number=B2B-XH-AM(LF)(SN), Manufacturer_Name="JST (JAPAN SOLDERLESS TERMINALS)", Arrow Price/Stock=https://www.arrow.com/en/products/b2b-xh-am-lf-sn/jst-manufacturing?region=europe, Datasheet Link=https://www.jst-mfg.com/product/pdf/eng/eXH.pdf, Height=7mm, Manufacturer_Part_Number=B2B-XH-AM(LF)(SN)
CN16: "Connector", Arrow Part Number=FH12-26S-0.5SH(55), Manufacturer_Name=Hirose, Mouser Part Number=798-FH12-26S-0.5SH55, Arrow Price/Stock=https://www.arrow.com/en/products/fh12-26s-0.5sh-55/hirose-electric, Datasheet Link=https://datasheet.datasheetarchive.com/originals/distributors/SFDatasheet-1/sf-00023459.pdf, Height=2.2mm, Manufacturer_Part_Number=FH12-26S-0.5SH(55), Mouser Price/Stock=https://www.mouser.co.uk/ProductDetail/Hirose-Connector/FH12-26S-0.5SH55?qs=Ux3WWAnHpjC%2FipJJsmJDaQ%3D%3D
D1 D2 D3 D4 D5: "DIODE SCHOTTKY 30V 200MA SOD323", Capacitance @ Vr, F="10pF @ 1V, 1MHz", Current - Average Rectified (Io)=200mA, Current - Reverse Leakage @ Vr="500 nA @ 25 V", manufacturer="Diodes Incorporated", Operating Temperature - Junction="-55°C ~ 125°C", Package / Case="SC-76, SOD-323", Supplier Device Package=SOD-323, Supplier Part Number 1=BAT42WS-FDICT-ND, Voltage - DC Reverse (Vr) (Max)="30 V", Voltage - Forward (Vf) (Max) @ If="1 V @ 200 mA", componentlink1description=Datasheet, componentlink1url=https://www.diodes.com/assets/Datasheets/ds30100.pdf, componentlink2description="DigiKey Link", componentlink2url=https://www.digikey.com/en/products/detail/diodes-incorporated/BAT42WS-7-F/806536, Diode Type=Schottky, lastupdated="9/7/2023 8:41:08 PM", Lifecycle Status=Active, Minimum Order=1, Mounting Type="Surface Mount", packaging=TapeAndReel, Part Number=BAT42WS-7-F, Part Status=Active, partid=3090, price=0.06, Reverse Recovery Time (trr)="5 ns", series=-, Speed="Small Signal =< 200mA (Io), Any Speed", Supplier 1=DigiKey
Q1 Q2 Q3 Q4 Q5 Q6 Q7: "MOSFET (N-Channel)", Manufacturer_Name=Infineon, Mouser Part Number=N/A, Datasheet Link=https://www.infineon.com/dgdl/irlr7843.pdf?fileId=5546d462533600a40153566ddfe226d6, Height=2.52mm, Manufacturer_Part_Number=IRLR7843TR, Mouser Price/Stock=https://www.mouser.co.uk/ProductDetail/Infineon-IR/IRLR7843TR?qs=Gkr2N%2F2q3o0Mj9Jsrst%252Bfw%3D%3D
R1 R2 R3 R4 R5 R6 R16 R17 R18 R19: library part ERJ-U6SFR15V, "RES 0.15 OHM 1% 1/4W 0805", Device Package="0805 (2012 Metric)", manufacturer="Panasonic Electronic Components", Operating Temperature="-55°C ~ 155°C", Power (Watts)="0.25W, 1/4W", Ratings=AEC-Q200, Resistance="150 mOhms", Supplier Device Package=0805, Supplier Part Number 1=10-ERJ-U6SFR15VCT-ND, Temperature Coefficient=±150ppm/°C, Tolerance=±1%, componentlink1description=Datasheet, componentlink1url=https://industrial.panasonic.com/cdbs/www-data/pdf/RDP0000/AOA0000C334.pdf, componentlink2description="DigiKey Link", componentlink2url=https://www.digikey.com/en/products/detail/panasonic-electronic-components/ERJ-U6SFR15V/2811826, Composition="Thick Film", Features="Anti-Sulfur, Automotive AEC-Q200", Height - Seated (Max)="0.026\" (0.65mm)", lastupdated="6/24/2023 8:04:48 PM", Lifecycle Status=Active, Minimum Order=1, Number of Terminations=2, Package / Case="0805 (2012 Metric)", packaging=TapeAndReel, Part Number=ERJ-U6SFR15V, Part Status=Active, partid=27705, price=0.08, series=ERJ-U6S, Size / Dimension="0.079\" L x 0.049\" W (2.00mm x 1.25mm)", Supplier 1=DigiKey
R7 R8 R9 R10 R11 R12 R14 R20 R21 R24 R26 R35: library part ERJ-UP3F2002V, "RES 20K OHM 1% 1/4W 0603", Device Package="0603 (1608 Metric)", manufacturer="Panasonic Electronic Components", Operating Temperature="-55°C ~ 155°C", Power (Watts)="0.25W, 1/4W", Ratings=AEC-Q200, Resistance="20 kOhms", Supplier Device Package=0603, Supplier Part Number 1=10-ERJ-UP3F2002VCT-ND, Temperature Coefficient=±100ppm/°C, Tolerance=±1%, componentlink1description=Datasheet, componentlink1url=https://b2b-api.panasonic.eu/file_stream/pids/fileversion/4484, componentlink2description="DigiKey Link", componentlink2url=https://www.digikey.com/en/products/detail/panasonic-electronic-components/ERJ-UP3F2002V/12092896, Composition="Thick Film", Features="Anti-Sulfur, Automotive AEC-Q200, Pulse Withstanding", Height - Seated (Max)="0.022\" (0.55mm)", lastupdated="4/8/2023 7:29:07 PM", Lifecycle Status=Active, Minimum Order=1, Number of Terminations=2, Package / Case="0603 (1608 Metric)", packaging=TapeAndReel, Part Number=ERJ-UP3F2002V, Part Status=Active, partid=63566, price=0.03, series=ERJ-UP3, Size / Dimension="0.063\" L x 0.031\" W (1.60mm x 0.80mm)", Supplier 1=DigiKey
R22 R23 R33 R34 R36: library part TC33X-2-203E, "TRIMMER 20K OHM 0.1W J LEAD TOP", manufacturer="Bourns Inc.", Power (Watts)="0.1W, 1/10W", Resistance="20 kOhms", Resistive Material=Cermet, Supplier Part Number 1=TC33X-2-203ECT-ND, Temperature Coefficient=±250ppm/°C, Tolerance=±25%, Adjustment Type="Top Adjustment", componentlink1description=Datasheet, componentlink1url=https://www.bourns.com/docs/Product-Datasheets/TC33.pdf, componentlink2description="DigiKey Link", componentlink2url=https://www.digikey.com/en/products/detail/bourns-inc/TC33X-2-203E/2566887, lastupdated="9/7/2023 8:25:30 PM", Lifecycle Status=Active, Minimum Order=1, Mounting Type="Surface Mount", Number of Turns=1, packaging=TapeAndReel, Part Number=TC33X-2-203E, Part Status=Active, partid=12, price=0.11, series="Trimpot® TC33 - Open Frame", Size / Dimension="Rectangular - 0.150\" x 0.142\" Face (3.80mm x 3.60mm)", Supplier 1=DigiKey, Termination Style="J Lead"
R28 R37: library part RCS0603240RFKEA, "RES SMD 240 OHM 1% 1/4W 0603", Device Package="0603 (1608 Metric)", manufacturer="Vishay Dale", Operating Temperature="-55°C ~ 155°C", Power (Watts)="0.25W, 1/4W", Ratings=AEC-Q200, Resistance="240 Ohms", Supplier Device Package=0603, Supplier Part Number 1=541-RCS0603240RFKEACT-ND, Temperature Coefficient=±100ppm/°C, Tolerance=±1%, componentlink1description=Datasheet, componentlink1url=https://www.vishay.com/docs/20065/rcse3.pdf, componentlink2description="DigiKey Link", componentlink2url=https://www.digikey.com/en/products/detail/vishay-dale/RCS0603240RFKEA/5868414, Composition="Thick Film", Features="Automotive AEC-Q200, Pulse Withstanding", Height - Seated (Max)="0.020\" (0.50mm)", lastupdated="4/8/2023 7:29:03 PM", Lifecycle Status=Active, Minimum Order=1, Number of Terminations=2, Package / Case="0603 (1608 Metric)", packaging=TapeAndReel, Part Number=RCS0603240RFKEA, Part Status=Active, partid=62490, price=0.02, series="RCS e3", Size / Dimension="0.061\" L x 0.033\" W (1.55mm x 0.85mm)", Supplier 1=DigiKey
R29 R38: library part ESR03EZPJ202, "RES SMD 2K OHM 5% 1/4W 0603", Device Package="0603 (1608 Metric)", manufacturer="Rohm Semiconductor", Operating Temperature="-55°C ~ 155°C", Power (Watts)="0.25W, 1/4W", Ratings=AEC-Q200, Resistance="2 kOhms", Supplier Device Package=0603, Supplier Part Number 1=RHM2.0KDCT-ND, Temperature Coefficient=±200ppm/°C, Tolerance=±5%, componentlink1description=Datasheet, componentlink1url=https://www.rohm.com/datasheet/ESR01MZPF/esr-e, componentlink2description="DigiKey Link", componentlink2url=https://www.digikey.com/en/products/detail/rohm-semiconductor/ESR03EZPJ202/1762725, Composition="Thick Film", Features="Automotive AEC-Q200, Pulse Withstanding", Height - Seated (Max)="0.022\" (0.55mm)", lastupdated="4/8/2023 7:30:16 PM", Lifecycle Status=Active, Minimum Order=1, Number of Terminations=2, Package / Case="0603 (1608 Metric)", packaging=TapeAndReel, Part Number=ESR03EZPJ202, Part Status=Active, partid=16457, price=0.01, series=ESR, Size / Dimension="0.063\" L x 0.031\" W (1.60mm x 0.80mm)", Supplier 1=DigiKey
R30 R31 R32: library part RC0603FR-7W10KL, "RES 10K OHM 1% 1/5W 0603", Device Package="0603 (1608 Metric)", manufacturer=Yageo, Operating Temperature="-55°C ~ 155°C", Power (Watts)="0.2W, 1/5W", Resistance="10 kOhms", Supplier Device Package=0603, Supplier Part Number 1=13-RC0603FR-7W10KLCT-ND, Temperature Coefficient=±200ppm/°C, Tolerance=±1%, componentlink1description=Datasheet, componentlink1url=https://www.yageo.com/upload/media/product/productsearch/datasheet/rchip/PYu-RC_Group_51_RoHS_L_11.pdf, componentlink2description="DigiKey Link", componentlink2url=https://www.digikey.com/en/products/detail/yageo/RC0603FR-7W10KL/12698809, Composition="Thick Film", Features="Moisture Resistant", Height - Seated (Max)="0.022\" (0.55mm)", lastupdated="4/8/2023 7:28:57 PM", Lifecycle Status=Active, Minimum Order=1, Number of Terminations=2, Package / Case="0603 (1608 Metric)", packaging=CutTape, Part Number=RC0603FR-7W10KL, Part Status=Active, partid=67088, price=0.01, series=RC_L, Size / Dimension="0.063\" L x 0.031\" W (1.60mm x 0.80mm)", Supplier 1=DigiKey
U1 U2 U3 U4 U5: "Integrated Circuit", Manufacturer_Name=TRINAMIC, Mouser Part Number=700-TMC2208-LA-T, Datasheet Link=https://datasheet.datasheetarchive.com/originals/distributors/DKDS-23/450911.pdf, Height=0.9mm, Manufacturer_Part_Number=TMC2208-LA-T, Mouser Price/Stock=https://www.mouser.co.uk/ProductDetail/Trinamic/TMC2208-LA-T?qs=TiOZkKH1s2TUCbyrI5xF3A%3D%3D
U6 U12: "Integrated Circuit", Manufacturer_Name=onsemi, Mouser Part Number=863-LM317MBSTT3G, Arrow Part Number=LM317MBSTT3G, Arrow Price/Stock=https://www.arrow.com/en/products/lm317mbstt3g/on-semiconductor?region=nac, Datasheet Link=http://www.farnell.com/datasheets/2058184.pdf, Height=1.75mm, Manufacturer_Part_Number=LM317MBSTT3G, Mouser Price/Stock=https://www.mouser.co.uk/ProductDetail/onsemi/LM317MBSTT3G?qs=2OtswVQKCOFxsFzIc5DGlw%3D%3D
U7 U8 U9 U10: "Integrated Circuit", Manufacturer_Name=Microchip, Mouser Part Number=579-TC4427EOA713, Arrow Part Number=TC4427EOA713, Arrow Price/Stock=https://www.arrow.com/en/products/tc4427eoa713/microchip-technology, Datasheet Link=http://www.microchip.com/mymicrochip/filehandler.aspx?ddocname=en011741, Height=1.75mm, Manufacturer_Part_Number=TC4427EOA713, Mouser Price/Stock=https://www.mouser.co.uk/ProductDetail/Microchip-Technology/TC4427EOA713?qs=iwvYsH9bSFbKmD8r5x5IJg%3D%3D
U11: "Integrated Circuit", Manufacturer_Name=NXP, Mouser Part Number=771-NX3L4051PW118, Arrow Part Number=NX3L4051PW,118, Arrow Price/Stock=https://www.arrow.com/en/products/nx3l4051pw118/nxp-semiconductors?region=nac, Datasheet Link=http://www.nxp.com/docs/en/data-sheet/NX3L4051.pdf, Height=1.1mm, Manufacturer_Part_Number=NX3L4051PW,118, Mouser Price/Stock=https://www.mouser.co.uk/ProductDetail/NXP-Semiconductors/NX3L4051PW118?qs=vbj%2FKoHZRAgFepmnkfH0Pw%3D%3D

## Via types
v1: diameter 19.68, hole 11.81, Top Layer to Bottom Layer, 24 vias

## Nets (pads, with @x,y where several pads share a name; then routed paths per layer and width w, separated by ;. In a path a pad name is that pad's centre, name@x,y a point inside that pad or via, vN(x,y) a via of type N, cw(c..) or ccw(c..) an arc to the next point about the centre after c; other vN are vias at no path point)
3V3: C21.2 C22.2 C24.2 C52.2 C53.2 C68.2 C76.2 R7.2 R8.1 R9.1 R11.2 R20.1 R21.1 R35.1 R37.2 U1.15 U2.15 U3.15 U4.15 U5.15 U11.16 U12.2 U12.4
5V: C70.1 C75.2 CN4.4 U12.3 | length 780.1
  Top Layer w10: CN4.4 430.53,1775.53 500.53,1775.53 608.43,1883.43 C70.1 1064.02,1883.43 U12.3 1070,1889.41 C75.2
12V: C67.2 C71.2 C72.2 C73.2 C74.2 R28.2 U6.2 U6.4 U7.6 U8.6 U9.6 U10.6 | length 2029.7
  Top Layer w8: R28.2 1545,1390 1555,1380 U6.2 U6.4 1918.43,1383.43 C67.2 2150,1383.43 ; U10.6 2150,1383.43 ; U7.6 2450,1383.43 ; U8.6 2745,1383.43 ; U9.6 3045,1381.85 ; C71.2 3045,1381.85 ; 2150,1383.43 C74.2 2450,1383.43 ; 2450,1383.43 2618.43,1383.43 2625,1390 2631.57,1383.43 2745,1383.43 ; 2745,1383.43 C72.2 2921.57,1381.85 3045,1381.85
24V: C1.2 C2.2 C3.2 C4.2 C5.2 C6.2 C11.2 C12.2 C13.2 C19.1 C20.1 C23.1 C28.2 C29.2 C30.2 C31.2 C32.2 C33.2 C50.1 C51.1 C66.2 C69.1 CN3.2 CN3.4 CN3.6 CN4.2 CN10.1 CN13.1 CN14.1 CN15.1 U1.22 U1.28 U2.22 U2.28 U3.22 U3.28 U4.22 U4.28 U5.22 U5.28 U6.3 | length 263.8
  Top Layer w10: C19.1 150,2368.62 150,2395 140.51,2404.49 C1.2 142.4,2440 170,2440 175,2445 175,2530 192.09,2547.09 C3.2 ; U1.28@365.43,2575 U1.28
BED: CN3.5 Q7.2
BEDG: Q7.1 U10.7 | length 1513.4
  Top Layer w8: Q7.1 855.55,1155.55 934,1234 2180,1234 2200,1254 U10.7
DIAG: CN16.25 D1.2 D2.2 D3.2 D4.2 D5.2 | length 599.8
  Top Layer w5: D5.2 D1.2 D4.2 D3.2 D2.2 3510,1880 3530,1860 3639.33,1860 CN16.25
DIR1: CN16.10 U1.19 | length 3508.3
  Top Layer w5: U1.19 519.65,2499.84 564.84,2499.84 v1(565,2500) ; v1(1255,2130) 1730,1655 3308.14,1655 3398.61,1564.53 3639.53,1564.53 CN16.10
  Bottom Layer w5: v1(565,2500) 885,2500 v1(1255,2130)
DIR2: CN16.12 U4.19 | length 2707
  Top Layer w5: U4.19 1304.65,2499.84 1349.84,2499.84 v1(1350,2500) ; v1(1925,1925) 2175,1675 3316.42,1675 3388,1603.43 CN16.12
  Bottom Layer w5: v1(1350,2500) v1(1925,1925)
DIR3: CN16.14 U2.19 | length 2045.1
  Top Layer w5: U2.19 2044.27,2500.3 2089.7,2500.3 v1(2090,2500) ; v1(2610,1820) 2735,1695 3324.71,1695 3376.91,1642.8 CN16.14
  Bottom Layer w5: v1(2090,2500) 2610,1980 v1(2610,1820)
DIR4: CN16.16 U5.19 | length 1546.4
  Top Layer w5: U5.19 2784.65,2499.84 2829.84,2499.84 v1(2830,2500) ; v1(2990,1740) 3015,1715 3332.99,1715 3366.49,1681.49 3639.33,1681.49 CN16.16
  Bottom Layer w5: v1(2830,2500) 2990,2340 v1(2990,1740)
DIR5: CN16.18 U3.19 | length 1031
  Top Layer w5: U3.19 3544.65,2499.84 3589.84,2499.84 v1(3590,2500) ; CN16.18 3640.77,1720.77 3699.33,1720.77 v1(3700,1720.1)
  Bottom Layer w5: v1(3590,2500) 3795,2295 3795,1780 3735,1720 3700.1,1720 v1(3700,1720.1)
ENN: CN16.24 R7.1 U1.2 U2.2 U3.2 U4.2 U5.2
FANG: Q6.1 U9.5 | length 317.9
  Top Layer w8: U9.5 2995,1245 3035,1205 3095,1205 3130.55,1169.45 Q6.1
FHE0G: Q3.1 U8.7 | length 248.2
  Top Layer w8: Q3.1 2750.55,1195.55 2795,1240 U8.7
FHE1G: Q4.1 U8.5 | length 509.5
  Top Layer w8: Q4.1 2370.55,1145.55 2420,1195 2665,1195 2695,1225 U8.5
GND: C1.1 C2.1 C3.1 C4.1 C5.1 C6.1 C7.2 C8.2 C9.2 C10.2 C11.1 C12.1 C13.1 C14.2 C15.2 C21.1 C22.1 C24.1 C25.1 C26.1 C27.1 C28.1 C29.1 C30.1 C31.1 C32.1 C33.1 C34.2 C35.2 C36.2 C37.2 C38.1 C39.1 C40.1 C41.1 C42.1 C43.1 C44.1 C45.1 C46.1 C47.1 C52.1 C53.1 C54.1 C55.1 C56.1 C57.1 C58.1 C59.1 C60.1 C61.1 C62.1 C63.1 C64.1 C65.1 C66.1 C67.1 C68.1 C69.2 C70.2 C71.1 C72.1 C73.1 C74.1 C75.1 C76.1 CN4.1 CN4.3 CN16.8 CN16.19 CN16.26 CN16.MP1 CN16.MP2 Q1.3 Q2.3 Q3.3 Q4.3 Q5.3 Q6.3 Q7.3 R1.2 R2.2 R3.2 R4.2 R5.2 R6.2 R10.1 R12.1 R14.1 R16.2 R17.2 R18.2 R19.2 R22.3 R23.3 R24.1 R26.1 R29.1 R30.2 R31.2 R32.2 R33.3 R34.3 R36.3 R38.1 U1.3 U1.18 U1.29 U2.3 U2.18 U2.29 U3.3 U3.18 U3.29 U4.3 U4.18 U4.29 U5.3 U5.18 U5.29 U7.3 U8.3 U9.3 U10.3 U11.6 U11.8
HE0: CN3.1 Q1.2
HE0G: Q1.1 U7.7 | length 735.7
  Top Layer w8: Q1.1 1950.55,1155.55 2003,1208 2475,1208 2500,1233 U7.7
HE1: CN3.3 Q2.2
HE1G: Q2.1 U7.5 | length 1269.3
  Top Layer w8: Q2.1 1300.55,1140.55 1381,1221 2375,1221 2400,1246 U7.5
MLPX_A: CN16.21 R30.1 U11.9 | length 1106.4
  Top Layer w5: U11.9 2795,1869.41 ; R30.1 2794.41,1868.82 2795,1869.41 ; CN16.21 3064.41,1780.59 2975.59,1869.41 2795,1869.41
MLPX_B: CN16.22 R31.1 U11.10 | length 1099.8
  Top Layer w5: U11.10 2719.41,1895 2735,1879.41 2795,1879.41 ; R31.1 2795,1879.41 ; CN16.22 3059.72,1800.28 2980.59,1879.41 2795,1879.41
MLPX_C: CN16.23 R32.1 U11.11 | length 1096
  Top Layer w5: U11.11 2710.59,1920.59 2740,1950 2925,1950 3055.04,1819.96 CN16.23
NetC7_1: C7.1 R1.1 U1.27
NetC8_1: C8.1 R2.1 U1.23
NetC9_1: C9.1 R3.1 U2.27 | length 250.3
  Top Layer w10: C9.1 1811.57,2688.46 R3.1 1869.41,2680.59 1910.12,2639.88 U2.27
NetC10_1: C10.1 R4.1 U2.23 | length 240.7
  Top Layer w10: U2.23 1988.86,2638.86 2030.59,2680.59 R4.1 2078.43,2688.46 C10.1
NetC14_1: C14.1 R5.1 U3.27 | length 250.5
  Top Layer w10: C14.1 3312.09,2687.56 R5.1 3370.31,2679.68 3410.63,2639.37 U3.27
NetC15_1: C15.1 R6.1 U3.23 | length 238.6
  Top Layer w10: U3.23 3489.37,2634.37 3534.69,2679.68 R6.1 3578.94,2687.56 C15.1
NetC16_1: C16.1 U1.4 | length 124.7
  Top Layer w5: C16.1 263.74,2491.26 275,2480 U1.4
NetC16_2: C16.2 U1.5 | length 129.2
  Top Layer w5: C16.2 258.11,2438.11 280.32,2460.32 U1.5
NetC17_1: C17.1 U2.4
NetC17_2: C17.2 U2.5
NetC18_1: C18.1 U3.4
NetC18_2: C18.2 U3.5
NetC19_2: C19.2 U1.6 | length 166.6
  Top Layer w5: C19.2 239.68,2364.68 255,2380 255,2400 295.63,2440.63 U1.6
NetC20_2: C20.2 U2.6
NetC23_2: C23.2 U3.6
NetC25_2: C25.2 U2.8 U2.9 U2.10
NetC26_2: C26.2 U1.8 U1.9 U1.10 | length 235.9
  Top Layer w5: C26.2 239.68,2294.68 330.51,2385.51 U1.8 U1.9 U1.10
NetC27_2: C27.2 U3.8 U3.9 U3.10
NetC34_1: C34.1 R16.1 U4.27 | length 250.5
  Top Layer w10: C34.1 1072.09,2687.56 R16.1 1130.32,2679.68 1170.63,2639.37 U4.27
NetC35_1: C35.1 R17.1 U4.23 | length 241.5
  Top Layer w10: U4.23 1249.37,2639.37 1289.68,2679.68 R17.1 1331.06,2746.81 C35.1
NetC36_1: C36.1 R18.1 U5.27 | length 247.7
  Top Layer w10: C36.1 2552.09,2687.36 R18.1 2605,2680 2650.63,2634.37 U5.27
NetC37_1: C37.1 R19.1 U5.23 | length 237.8
  Top Layer w10: U5.23 2729.37,2634.37 2775,2680 R19.1 2818.94,2688.94 C37.1
NetC48_1: C48.1 U4.4
NetC48_2: C48.2 U4.5
NetC49_1: C49.1 U5.4
NetC49_2: C49.2 U5.5
NetC50_2: C50.2 U4.6
NetC51_2: C51.2 U5.6
NetC64_2: C64.2 U4.8 U4.9 U4.10
NetC65_2: C65.2 U5.8 U5.9 U5.10
NetCN10_2: CN10.2 Q3.2
NetCN13_2: CN13.2 Q4.2
NetCN14_2: CN14.2 Q5.2
NetCN15_2: CN15.2 Q6.2
NetCN16_1: CN16.1 U9.2 | length 672.4
  Top Layer w5: U9.2 3095,1560 3110,1575 3275,1575 3463.11,1386.89 CN16.1
NetCN16_2: CN16.2 U9.4 | length 775.4
  Top Layer w5: U9.4 2995,1565 3015,1585 3279.14,1585 3439.57,1424.57 3457.57,1406.57 CN16.2
NetCN16_3: CN16.3 U8.2 | length 970.5
  Top Layer w5: U8.2 2795,1565 2825,1595 3283.28,1595 3452.02,1426.26 CN16.3
NetCN16_4: CN16.4 U8.4 | length 1070.7
  Top Layer w5: U8.4 2695,1565 2735,1605 3287.43,1605 3446.48,1445.94 CN16.4
NetCN16_5: CN16.5 U7.2 | length 1268.7
  Top Layer w5: U7.2 2500,1570 2545,1615 3291.57,1615 3440.94,1465.63 CN16.5
NetCN16_6: CN16.6 U7.4 | length 1365.9
  Top Layer w5: U7.4 2400,1565 2460,1625 3295.71,1625 3435.4,1485.32 CN16.6
NetCN16_7: CN16.7 U10.2 | length 1571.1
  Top Layer w5: U10.2 2200,1565 2270,1635 3299.85,1635 3429.85,1505 CN16.7
NetD1_1: D1.1 U5.11
NetD2_1: D2.1 U1.11
NetD3_1: D3.1 U4.11
NetD4_1: D4.1 U2.11
NetD5_1: D5.1 U3.11 | length 303.5